# Altium PCB DRAM_TEMP_AD.pcbdoc (part 1 of 2)
Units mil, origin at the board's own origin, x right, y up, seen from the top; angles counter-clockwise.
Board outline 1637.1 x 1239.26 mil, 2 copper layers (Top Layer, Bottom Layer); 88 components, 167 nets, 455 pads, 173 vias.
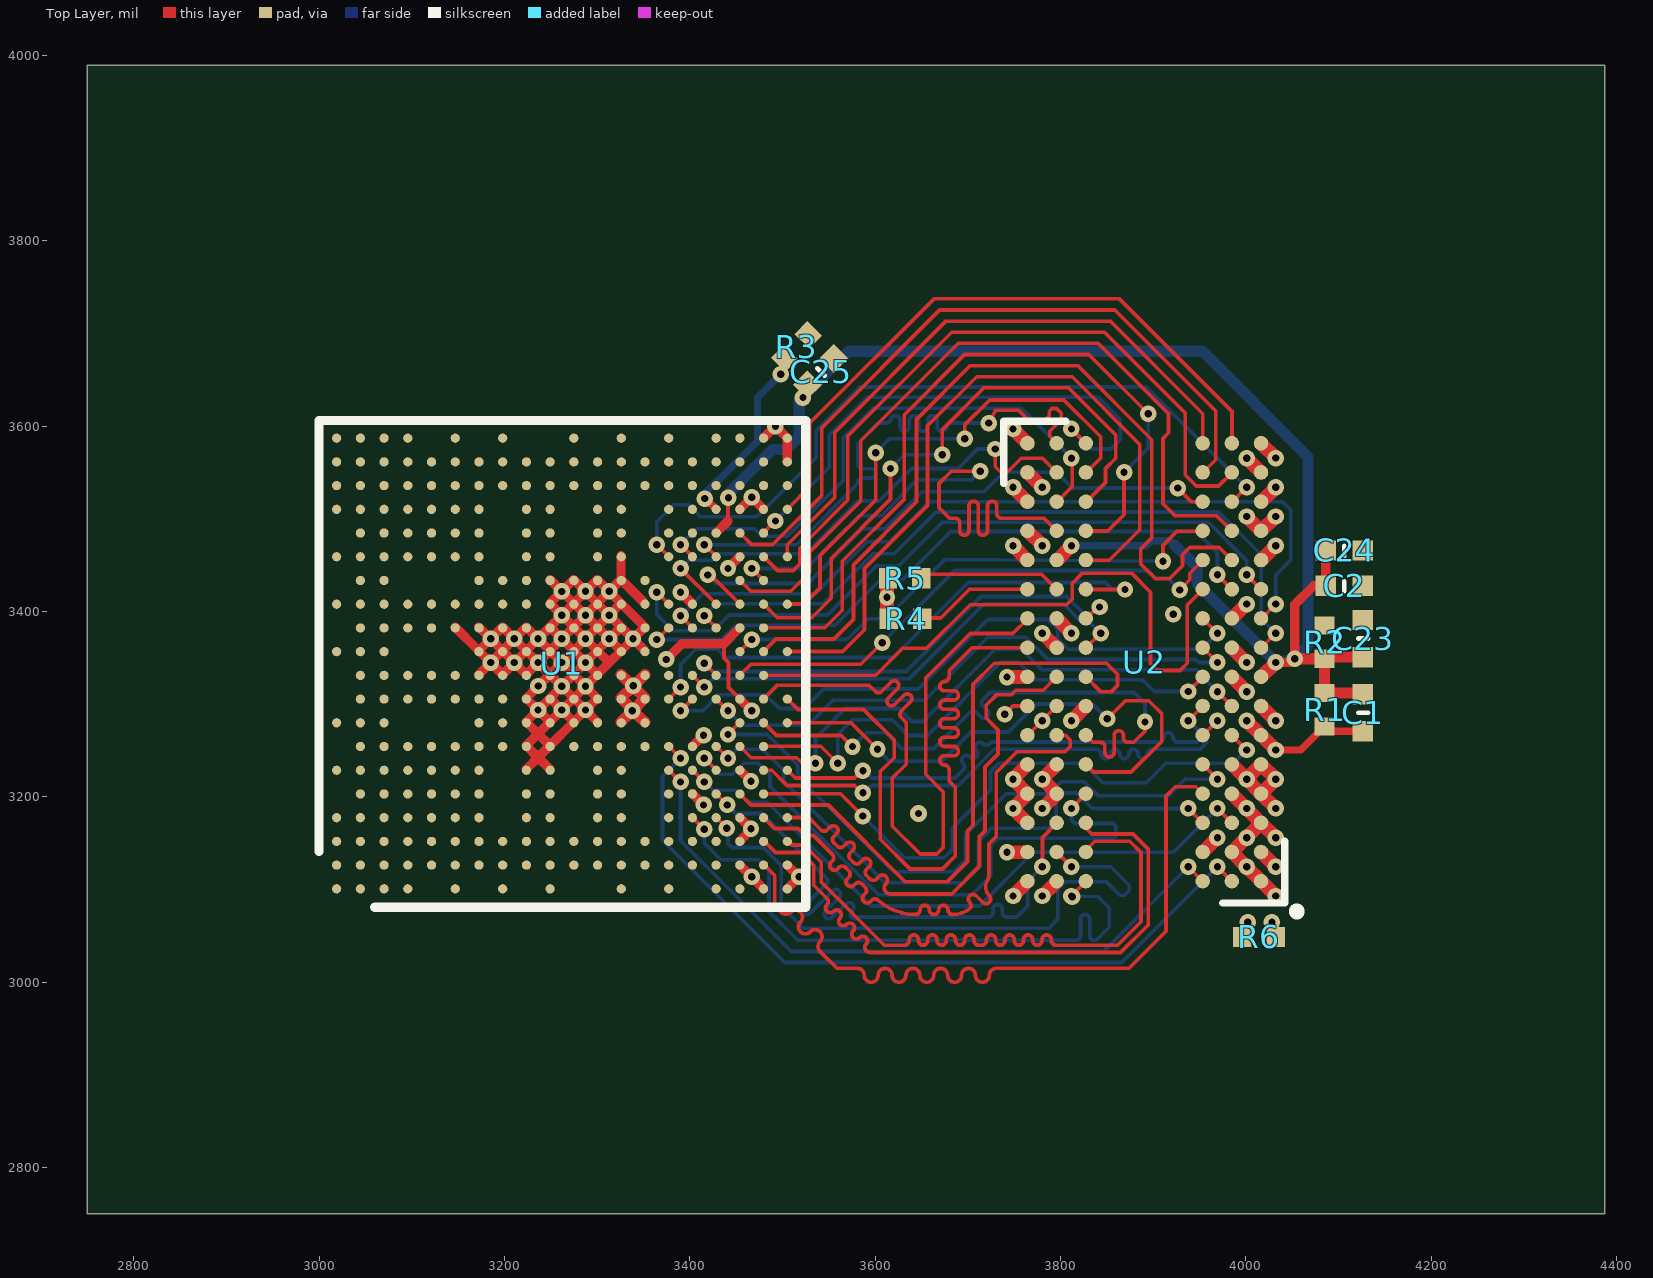
[diagram p0: Top Layer view]
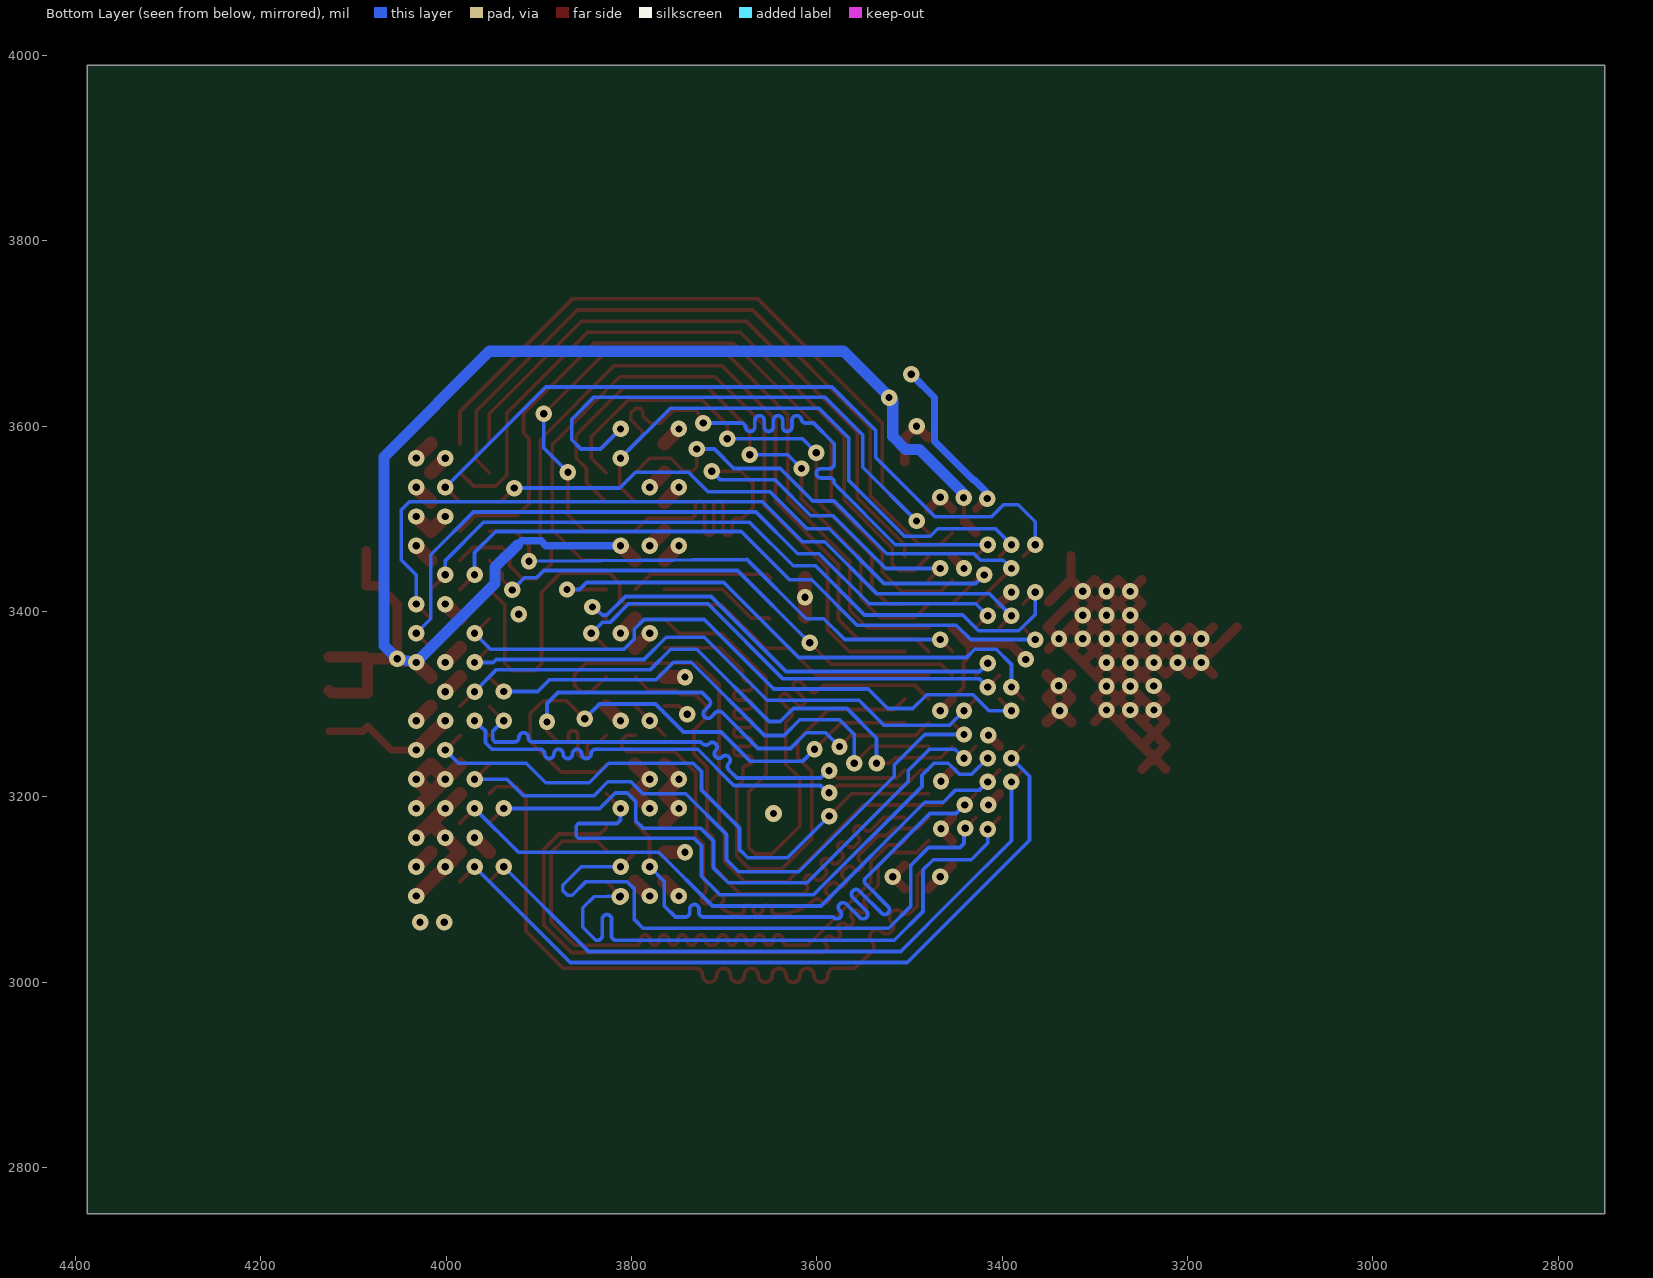
[diagram p1: Bottom Layer view, seen from below]

## Layer stack, top to bottom
Top Solder: solder mask 0.4, Solder Resist, Dk 3.5
Top Layer: signal copper 1.4
Dielectric 1: dielectric 12.6, FR-4, Dk 4.8
Bottom Layer: signal copper 1.4
Bottom Solder: solder mask 0.4, Solder Resist, Dk 3.5

## Board outline
4387.1,2750 2750,2750 2750,3989.26 4387.1,3989.26

## Components (designator, comment, footprint, x,y, rotation, side; value= is the part's Value field where it differs from the comment)
C1 "100nf" d97e8fdd746f4c7ebb948cd77a8558a6 4126.1,3290.8 r270 top
C2 "100nf" 274a75c993d74f52bd3cf981aeacad62 4106.1,3427.8 r180 top
C23 "100nf" 274a75c993d74f52bd3cf981aeacad62 4126.1,3370.8 r270 top
C24 "100nf" 274a75c993d74f52bd3cf981aeacad62 4106.1,3465.8 r180 top
C25 "100nf" 274a75c993d74f52bd3cf981aeacad62 3541.1,3658.8 r225 top
R1 "2K" 473bd841df654c8c86422112e2e4850d 4084.8,3294 r270 top
R2 "2K" 473bd841df654c8c86422112e2e4850d 4084.8,3367 r270 top
R3 "240" 473bd841df654c8c86422112e2e4850d 3515.1,3685.8 r225 top
R4 "240" 473bd841df654c8c86422112e2e4850d 3632.8,3392 r180 top
R5 "240" 473bd841df654c8c86422112e2e4850d 3631.8,3436 r180 top
R6 "100" 473bd841df654c8c86422112e2e4850d 4014.1,3048.8 r0 top
U1 "" "ALLWINNER D1" 3265,3356 r180 top
U2 "" 7343f89065f040aa94b273cc6ee9bc0e 3887.9,3350.4 r180 top
? "" ? 0,0 r0 top
? "" ? 0,0 r0 top
? "" ? 0,0 r0 top
? "" ? 0,0 r0 top
? "" ? 0,0 r0 top
? "" ? 0,0 r0 top
? "" ? 0,0 r0 top
? "" ? 0,0 r0 top
? "" ? 0,0 r0 top
? "" ? 0,0 r0 top
? "" ? 0,0 r0 top
? "" ? 0,0 r0 top
? "" ? 0,0 r0 top
? "" ? 0,0 r0 top
? "" ? 0,0 r0 top
? "" ? 0,0 r0 top
? "" ? 0,0 r0 top
? "" ? 0,0 r0 top
? "" ? 0,0 r0 top
? "" ? 0,0 r0 top
? "" ? 0,0 r0 top
? "" ? 0,0 r0 top
? "" ? 0,0 r0 top
? "" ? 0,0 r0 top
? "" ? 0,0 r0 top
? "" ? 0,0 r0 top
? "" ? 0,0 r0 top
? "" ? 0,0 r0 top
? "" ? 0,0 r0 top
? "" ? 0,0 r0 top
? "" ? 0,0 r0 top
? "" ? 0,0 r0 top
? "" ? 0,0 r0 top
? "" ? 0,0 r0 top
? "" ? 0,0 r0 top
? "" ? 0,0 r0 top
? "" ? 0,0 r0 top
? "" ? 0,0 r0 top
? "" ? 0,0 r0 top
? "" ? 0,0 r0 top
? "" ? 0,0 r0 top
? "" ? 0,0 r0 top
? "" ? 0,0 r0 top
? "" ? 0,0 r0 top
? "" ? 0,0 r0 top
? "" ? 0,0 r0 top
? "" ? 0,0 r0 top
? "" ? 0,0 r0 top
? "" ? 0,0 r0 top
? "" ? 0,0 r0 top
? "" ? 0,0 r0 top
? "" ? 0,0 r0 top
? "" ? 0,0 r0 top
? "" ? 0,0 r0 top
? "" ? 0,0 r0 top
? "" ? 0,0 r0 top
? "" ? 0,0 r0 top
? "" ? 0,0 r0 top
? "" ? 0,0 r0 top
? "" ? 0,0 r0 top
? "" ? 0,0 r0 top
? "" ? 0,0 r0 top
? "" ? 0,0 r0 top
? "" ? 0,0 r0 top
? "" ? 0,0 r0 top
? "" ? 0,0 r0 top
? "" ? 0,0 r0 top
? "" ? 0,0 r0 top
? "" ? 0,0 r0 top
? "" ? 0,0 r0 top
? "" ? 0,0 r0 top
? "" ? 0,0 r0 top
? "" ? 0,0 r0 top
? "" ? 0,0 r0 top
? "" ? 0,0 r0 top

## Footprints (in the part's own frame and the unit in brackets; to place one, negate y for a bottom-side part, rotate by r counter-clockwise, add the part's x,y. Pads: shape width x height; smd on the part's side, far side on the other; paste and mask are expansions set on the pad)
274a75c993d74f52bd3cf981aeacad62 [mil]
  rect 22x22 smd: 1(-19.99,0) 2(20.01,0)
  silkscreen extent 0,-5 0,6
473bd841df654c8c86422112e2e4850d [mil]
  rect 19.68x22 smd: 1(-18,0) 2(18,0)
7343f89065f040aa94b273cc6ee9bc0e [mil]
  round 15.7 smd: A1(-128.4,241.4) A2(-96.9,241.4) A3(-65.4,241.4) A7(60.6,241.4) A8(92.1,241.4) A9(123.6,241.4) B1(-128.4,209.9) B2(-96.9,209.9) B3(-65.4,209.9) B7(60.6,209.9) B8(92.1,209.9) B9(123.6,209.9) C1(-128.4,178.4) C2(-96.9,178.4) C3(-65.4,178.4) C7(60.6,178.4) C8(92.1,178.4) C9(123.6,178.4) D1(-128.4,146.9) D2(-96.9,146.9) D3(-65.4,146.9) D7(60.6,146.9) D8(92.1,146.9) D9(123.6,146.9) E1(-128.4,115.4) E2(-96.9,115.4) E3(-65.4,115.4) E7(60.6,115.4) E8(92.1,115.4) E9(123.6,115.4) F1(-128.4,83.9) F2(-96.9,83.9) F3(-65.4,83.9) F7(60.6,83.9) F8(92.1,83.9) F9(123.6,83.9) G1(-128.4,52.4) G2(-96.9,52.4) G3(-65.4,52.4) G7(60.6,52.4) G8(92.1,52.4) G9(123.6,52.4) H1(-128.4,20.9) H2(-96.9,20.9) H3(-65.4,20.9) H7(60.6,20.9) H8(92.1,20.9) H9(123.6,20.9) J1(-128.4,-10.6) J2(-96.9,-10.6) J3(-65.4,-10.6) J7(60.6,-10.6) J8(92.1,-10.6) J9(123.6,-10.6) K1(-128.4,-42.1) K2(-96.9,-42.1) K3(-65.4,-42.1) K7(60.6,-42.1) K8(92.1,-42.1) K9(123.6,-42.1) L1(-128.4,-73.6) L2(-96.9,-73.6) L3(-65.4,-73.6) L7(60.6,-73.6) L8(92.1,-73.6) L9(123.6,-73.6) M1(-128.4,-105.1) M2(-96.9,-105.1) M3(-65.4,-105.1) M7(60.6,-105.1) M8(92.1,-105.1) M9(123.6,-105.1) N1(-128.4,-136.6) N2(-96.9,-136.6) N3(-65.4,-136.6) N7(60.6,-136.6) N8(92.1,-136.6) N9(123.6,-136.6) P1(-128.4,-168.1) P2(-96.9,-168.1) P3(-65.4,-168.1) P7(60.6,-168.1) P8(92.1,-168.1) P9(123.6,-168.1) R1(-128.4,-199.6) R2(-96.9,-199.6) R3(-65.4,-199.6) R7(60.6,-199.6) R8(92.1,-199.6) R9(123.6,-199.6) T1(-128.4,-231.1) T2(-96.9,-231.1) T3(-65.4,-231.1) T7(60.6,-231.1) T8(92.1,-231.1) T9(123.6,-231.1)
  silkscreen extent -168,-255 149,275
"ALLWINNER D1" [mil]
  round 10 smd: A1(245.98,255.24) A2(245.98,229.65) A3(245.98,204.06) A4(245.98,178.47) A6(245.98,127.29) A8(245.98,76.11) A11(245.98,-0.67) A13(245.98,-51.85) A15(245.98,-103.03) A17(245.98,-154.21) A18(245.98,-179.8) A19(245.98,-205.39) A20(245.98,-230.98) B1(220.39,255.24) B2(220.39,229.65) B3(220.39,204.06) B4(220.39,178.47) B5(220.39,152.88) B6(220.39,127.29) B7(220.39,101.7) B8(220.39,76.11) B9(220.39,50.52) B10(220.39,24.93) B11(220.39,-0.67) B12(220.39,-26.26) B13(220.39,-51.85) B14(220.39,-77.44) B15(220.39,-103.03) B16(220.39,-128.62) B17(220.39,-154.21) B18(220.39,-179.8) B19(220.39,-205.39) B20(220.39,-230.98) C1(194.8,255.24) C2(194.8,229.65) C3(194.8,204.06) C4(194.8,178.47) C5(194.8,152.88) C6(194.8,127.29) C7(194.8,101.7) C8(194.8,76.11) C9(194.8,50.52) C10(194.8,24.93) C11(194.8,-0.67) C12(194.8,-26.26) C13(194.8,-51.85) C14(194.8,-77.44) C15(194.8,-103.03) C16(194.8,-128.62) C17(194.8,-154.21) C18(194.8,-179.8) C19(194.8,-205.39) C20(194.8,-230.98) D1(169.21,255.24) D2(169.21,229.65) D3(169.21,204.06) D4(169.21,178.47) D5(169.21,152.88) D6(169.21,127.29) D7(169.21,101.7) D9(169.21,50.52) D10(169.21,24.93) D12(169.21,-26.26) D13(169.21,-51.85) D15(169.21,-103.03) D16(169.21,-128.62) D17(169.21,-154.21) D18(169.21,-179.8) D19(169.21,-205.39) D20(169.21,-230.98) E2(143.62,229.65) E3(143.62,204.06) E4(143.62,178.47) E5(143.62,152.88) E6(143.62,127.29) E7(143.62,101.7) E9(143.62,50.52) E10(143.62,24.93) E12(143.62,-26.26) E13(143.62,-51.85) E15(143.62,-103.03) E16(143.62,-128.62) E17(143.62,-154.21) E18(143.62,-179.8) E19(143.62,-205.39) F1(118.03,255.24) F2(118.03,229.65) F3(118.03,204.06) F4(118.03,178.47) F5(118.03,152.88) F6(118.03,127.29) F7(118.03,101.7) F9(118.03,50.52) F10(118.03,24.93) F12(118.03,-26.26) F13(118.03,-51.85) F15(118.03,-103.03) F16(118.03,-128.62) F17(118.03,-154.21) F18(118.03,-179.8) F19(118.03,-205.39) F20(118.03,-230.98) G2(92.44,229.65) G3(92.44,204.06) G4(92.44,178.47) G5(92.44,152.88) G6(92.44,127.29) G7(92.44,101.7) G8(92.44,76.11) G9(92.44,50.52) G10(92.44,24.93) G11(92.44,-0.67) G12(92.44,-26.26) G13(92.44,-51.85) G14(92.44,-77.44) G15(92.44,-103.03) G16(92.44,-128.62) G17(92.44,-154.21) G18(92.44,-179.8) G19(92.44,-205.39) H1(66.85,255.24) H2(66.85,229.65) H3(66.85,204.06) H7(66.85,101.7) H8(66.85,76.11) H9(66.85,50.52) H10(66.85,24.93) H11(66.85,-0.67) H12(66.85,-26.26) H13(66.85,-51.85) H14(66.85,-77.44) H18(66.85,-179.8) H19(66.85,-205.39) H20(66.85,-230.98) J2(41.26,229.65) J3(41.26,204.06) J4(41.26,178.47) J5(41.26,152.88) J6(41.26,127.29) J7(41.26,101.7) J8(41.26,76.11) J9(41.26,50.52) J10(41.26,24.93) J11(41.26,-0.67) J12(41.26,-26.26) J13(41.26,-51.85) J14(41.26,-77.44) J15(41.26,-103.03) J16(41.26,-128.62) J17(41.26,-154.21) J18(41.26,-179.8) J19(41.26,-205.39) K1(15.67,255.24) K2(15.67,229.65) K3(15.67,204.06) K4(15.67,178.47) K5(15.67,152.88) K6(15.67,127.29) K7(15.67,101.7) K8(15.67,76.11) K9(15.67,50.52) K10(15.67,24.93) K11(15.67,-0.67) K12(15.67,-26.26) K13(15.67,-51.85) K14(15.67,-77.44) K15(15.67,-103.03) K16(15.67,-128.62) K17(15.67,-154.21) K18(15.67,-179.8) K19(15.67,-205.39) L2(-9.93,229.65) L3(-9.93,204.06) L7(-9.93,101.7) L8(-9.93,76.11) L9(-9.93,50.52) L10(-9.93,24.93) L11(-9.93,-0.67) L12(-9.93,-26.26) L13(-9.93,-51.85) L14(-9.93,-77.44) L18(-9.93,-179.8) L19(-9.93,-205.39) L20(-9.93,-230.98) M2(-35.52,229.65) M3(-35.52,204.06) M4(-35.52,178.47) M5(-35.52,152.88) M6(-35.52,127.29) M7(-35.52,101.7) M8(-35.52,76.11) M9(-35.52,50.52) M10(-35.52,24.93) M11(-35.52,-0.67) M12(-35.52,-26.26) M13(-35.52,-51.85) M14(-35.52,-77.44) M15(-35.52,-103.03) M16(-35.52,-128.62) M17(-35.52,-154.21) M18(-35.52,-179.8) M19(-35.52,-205.39) N1(-61.11,255.24) N2(-61.11,229.65) N3(-61.11,204.06) N4(-61.11,178.47) N5(-61.11,152.88) N6(-61.11,127.29) N7(-61.11,101.7) N8(-61.11,76.11) N9(-61.11,50.52) N10(-61.11,24.93) N11(-61.11,-0.67) N12(-61.11,-26.26) N13(-61.11,-51.85) N14(-61.11,-77.44) N15(-61.11,-103.03) N16(-61.11,-128.62) N17(-61.11,-154.21) N18(-61.11,-179.8) N19(-61.11,-205.39) N20(-61.11,-230.98) P2(-86.7,229.65) P3(-86.7,204.06) P7(-86.7,101.7) P8(-86.7,76.11) P9(-86.7,50.52) P10(-86.7,24.93) P11(-86.7,-0.67) P12(-86.7,-26.26) P13(-86.7,-51.85) P14(-86.7,-77.44) P18(-86.7,-179.8) P19(-86.7,-205.39) R1(-112.29,255.24) R2(-112.29,229.65) R3(-112.29,204.06) R4(-112.29,178.47) R5(-112.29,152.88) R6(-112.29,127.29) R7(-112.29,101.7) R9(-112.29,50.52) R10(-112.29,24.93) R12(-112.29,-26.26) R13(-112.29,-51.85) R15(-112.29,-103.03) R16(-112.29,-128.62) R17(-112.29,-154.21) R18(-112.29,-179.8) R19(-112.29,-205.39) R20(-112.29,-230.98) T2(-137.88,229.65) T3(-137.88,204.06) T4(-137.88,178.47) T5(-137.88,152.88) T6(-137.88,127.29) T7(-137.88,101.7) T9(-137.88,50.52) T10(-137.88,24.93) T12(-137.88,-26.26) T13(-137.88,-51.85) T15(-137.88,-103.03) T16(-137.88,-128.62) T17(-137.88,-154.21) T18(-137.88,-179.8) T19(-137.88,-205.39) U1(-163.47,255.24) U2(-163.47,229.65) U3(-163.47,204.06) U4(-163.47,178.47) U5(-163.47,152.88) U6(-163.47,127.29) U7(-163.47,101.7) U9(-163.47,50.52) U10(-163.47,24.93) U12(-163.47,-26.26) U13(-163.47,-51.85) U15(-163.47,-103.03) U16(-163.47,-128.62) U17(-163.47,-154.21) U18(-163.47,-179.8) U19(-163.47,-205.39) U20(-163.47,-230.98) V1(-189.06,255.24) V2(-189.06,229.65) V3(-189.06,204.06) V4(-189.06,178.47) V5(-189.06,152.88) V6(-189.06,127.29) V7(-189.06,101.7) V8(-189.06,76.11) V9(-189.06,50.52) V10(-189.06,24.93) V11(-189.06,-0.67) V12(-189.06,-26.26) V13(-189.06,-51.85) V14(-189.06,-77.44) V15(-189.06,-103.03) V16(-189.06,-128.62) V17(-189.06,-154.21) V18(-189.06,-179.8) V19(-189.06,-205.39) V20(-189.06,-230.98) W1(-214.65,255.24) W2(-214.65,229.65) W3(-214.65,204.06) W4(-214.65,178.47) W5(-214.65,152.88) W6(-214.65,127.29) W7(-214.65,101.7) W8(-214.65,76.11) W9(-214.65,50.52) W10(-214.65,24.93) W11(-214.65,-0.67) W12(-214.65,-26.26) W13(-214.65,-51.85) W14(-214.65,-77.44) W15(-214.65,-103.03) W16(-214.65,-128.62) W17(-214.65,-154.21) W18(-214.65,-179.8) W19(-214.65,-205.39) W20(-214.65,-230.98) Y1(-240.24,255.24) Y2(-240.24,229.65) Y3(-240.24,204.06) Y4(-240.24,178.47) Y6(-240.24,127.29) Y8(-240.24,76.11) Y9(-240.24,50.52) Y11(-240.24,-0.67) Y13(-240.24,-51.85) Y15(-240.24,-103.03) Y17(-240.24,-154.21) Y18(-240.24,-179.8) Y19(-240.24,-205.39) Y20(-240.24,-230.98)
  silkscreen extent -260,-250 265,275
d97e8fdd746f4c7ebb948cd77a8558a6 [mil]
  rect 22x22 smd: 1(-20,0) 2(20,0)
  silkscreen extent 0,-5 0,6
? [mil]

## Via types
v1: diameter 17.72, hole 7.87, Top Layer to Bottom Layer, 140 vias
v2: diameter 17.7, hole 7.9, Top Layer to Bottom Layer, 29 vias
v3: diameter 18, hole 8, Top Layer to Bottom Layer, 4 vias

## Nets (pads, with @x,y where several pads share a name; then routed paths per layer and width w, separated by ;. In a path a pad name is that pad's centre, name@x,y a point inside that pad or via, vN(x,y) a via of type N, cw(c..) or ccw(c..) an arc to the next point about the centre after c; other vN are vias at no path point)
0V9: 
1V5: C1.2 U1.N8 U1.N9 U1.N10 U1.P8 U1.P9 U1.P10 U2.A8 U2.B2 U2.C1 U2.C9 U2.D2 U2.D9 U2.E9 U2.F1 U2.G7 U2.H2 U2.H9 U2.K2 U2.K8 U2.N1 U2.N9 U2.R1 U2.R9 | length 808.6
  Top Layer w8: v1(4032.26,3250.51) 4059.31,3250.51 4084.8,3276 4090,3270.8 C1.2@4126.1,3270.8
  Top Layer w12: U1.N8@3325.91,3280.89 v3(3338.1,3292.8) ; U1.N10@3325.91,3332.07 v3@3338.7,3319.28 ; v3@3338.7,3293.68 3325.91,3306.48 v3@3338.7,3319.28 ; v3(3339.1,3319.8) v3@3338.7,3319.28 ; U1.P8@3351.5,3280.89 v3(3338.1,3292.8) ; U1.P10@3351.5,3332.07 v3@3338.7,3319.28 ; v3(3338.1,3292.8) 3351.5,3306.48 v3@3338.7,3319.28
  Top Layer w15: v1(3742.28,3329.25) U2.H9@3764.55,3329.25 ; U2.C9@3764.55,3171.77 v1(3748.8,3187.52) 3764.55,3203.27 v1(3748.8,3219.01) U2.E9@3764.55,3234.76 ; U2.N9@3764.55,3486.73 v1(3780.3,3470.98) ; U2.R9@3764.55,3549.72 v1(3780.3,3533.97) ; v1(3780.29,3093.03) U2.A8@3796.04,3108.78 ; U2.K8@3796.04,3392.24 v1(3811.79,3376.49) ; v1(3811.79,3282.01) U2.G7@3827.54,3297.76 ; U2.D2@3985.02,3203.27 v1(4000.77,3187.52) ; U2.H2@3985.02,3329.25 v1(4000.77,3313.5) ; U2.K2@3985.02,3392.24 v1(4000.77,3407.98) ; v1@4000.73,3124.49 4016.28,3108.98 v1(4032.26,3093.03) ; v1(4000.77,3124.53) 3985.02,3140.28 v1(4000.76,3156.02) U2.C1@4016.51,3171.76 ; v1(4000.76,3282) U2.F1@4016.3,3266.5 v1(4032.26,3250.51) ; v1(4000.76,3502.47) 4016.51,3486.73 v1(4032.26,3502.47) ; v1(4000.76,3565.46) U2.R1@4016.51,3549.72 ; v1(4000.77,3187.52) U2.C1@4016.51,3171.77 ; v1(4032.26,3156.02) U2.C1@4016.51,3171.76
1V8: U1.P14
3V3: U1.E4
$1N3408: 
$1N3418: 
$1N3424: 
$1N3432: 
$1N3433: 
$1N3434: 
$2N3534: U1.U17 | length 185.7
  Top Layer w8: v2(3416.1,3521.8) 3416.88,3521.8 U1.U17@3428.47,3510.21
  Bottom Layer w8: v2(3416.1,3521.8) 3416.1,3527.8 3430.1,3541.8 3431.1,3541.8 3473.1,3583.8 3473.1,3630.8 v2(3498.1,3655.8)
$2N3599: R4.1 U2.L9 | length 126.8
  Top Layer w4: R4.1@3650.8,3392 3651.8,3393 3670.8,3393 3701.8,3424 U2.L9@3764.3,3424
$2N3600: R5.1 U2.L8 | length 154.3
  Top Layer w4: R5.1@3649.8,3436 3653.8,3440 3779.8,3440 U2.L8@3795.8,3424
$3N2270: 
$3N2271: 
$3N2545: U1.D9
$3N2556: U1.C9
$3N2562: U1.E10
$3N2568: U1.F10
$3N2574: U1.B9
$3N2580: U1.E18
$3N2586: U1.E19
$3N2592: U1.E9
$3N2601: U1.M17
$3N2609: U1.K18
$3N2621: U1.K19
$3N2635: U1.J18
$3N2636: U1.J19
$3N2637: U1.H19
$3N2654: U1.H20
$3N2655: U1.L19
$3N2656: U1.L20
$3N2657: U1.G19
$3N2658: U1.G18
$3N2659: U1.F19
$3N2671: U1.F20
$6N745: U1.D7
$6N750: U1.E7
$6N753: U1.F7
$6N756: U1.F6
$6N757: U1.E6
$6N767: U1.D6
$6N768: U1.D5
$6N769: U1.D4
$6N770: U1.C6
$6N771: U1.B6
$6N778: U1.A6
$6N779: U1.C5
$6N780: U1.B5
$6N781: U1.B4
$6N782: U1.A4
$6N789: U1.C3
$6N790: U1.A3
$6N791: U1.B3
$6N792: U1.B2
$6N4195: 
$6N4196: 
$6N4201: 
$6N4202: 
$6N4203: 
$6N4204: 
$6N4213: 
$7N781: 
$7N1968: U1.D2
AP_WAKE_BT: 
BT_RSTN: 
BT_WAKE_AP: 
D0+: U1.B7
D0-: U1.C7
D1+: U1.A8
D1-: U1.B8
EMMC_CLK: 
EMMC_CMD: U1.D1
EMMC_D0: U1.C1
EMMC_D1: U1.C2
EMMC_D2: U1.E2
EMMC_D3: U1.E3
GND: R2.1 R3.1 U1.A2 U1.A15 U1.A19 U1.A20 U1.B1 U1.B10 U1.B20 U1.C4 U1.C8 U1.C10 U1.E5 U1.F3 U1.F9 U1.F12 U1.F18 U1.G10 U1.G11 U1.G12 U1.H1 U1.H2 U1.H10 U1.H11 U1.H12 U1.H18 U1.J3 U1.J6 U1.J7 U1.J8 U1.J9 U1.J10 U1.J11 U1.J12 U1.K3 U1.K6 U1.K7 U1.K8 U1.K9 U1.K10 U1.K11 U1.K12 U1.K13 U1.K14 U1.L8 U1.L9 U1.L10 U1.L11 U1.L12 U1.L13 U1.L14 U1.L18 U1.M3 U1.M5 U1.M8 U1.M9 U1.M10 U1.M11 U1.M12 U1.M13 U1.M14 U1.N11 U1.N12 U1.N13 U1.N14 U1.N15 U1.N18 U1.P7 U1.P11 U1.P12 U1.P13 U1.R10 U1.R18 U1.T5 U1.T7 U1.T13 U1.V2 U1.V3 U1.V4 U1.V6 U1.V9 U1.V12 U1.V15 U1.V17 U1.W1 U1.W17 U1.W20 U1.Y1 U1.Y2 U1.Y19 U1.Y20 U2.A9 U2.B1 U2.B3 U2.B9 U2.D1 U2.D8 U2.E1 U2.E2 U2.E8 U2.F9 U2.G1 U2.G8 U2.G9 U2.J2 U2.J8 U2.M1 U2.M9 U2.P1 U2.P9 U2.T1 U2.T9 | length 3218.4
  Top Layer w4: v1(3739.8,3289) 3748.8,3298 U2.G9@3764.3,3298 ; U2.F9@3764.3,3266.5 v1(3780.29,3282.01) U2.G8@3795.8,3298
  Top Layer w4.5: 3436.85,3365.26 3436.85,3349.96 3441.89,3344.92 3441.89,3317.82 U1.V9@3454.04,3305.67
  Top Layer w10: U1.F12@3146.77,3383.26 U1.G11@3172.36,3357.67 ; U1.G10@3172.36,3332.07 v2(3185.16,3344.87) ; U1.G12@3172.36,3383.26 v2(3185.16,3370.47) ; U1.J6@3223.55,3229.7 3236.34,3242.5 ; U1.J10@3223.54,3332.07 v2(3236.34,3344.87) ; U1.J10@3223.54,3332.08 v2(3210.74,3344.88) ; U1.K6@3249.13,3229.71 3236.34,3242.5 ; U1.K14@3249.13,3434.44 v2(3261.93,3421.64) ; U1.L8@3274.72,3280.89 v2(3261.93,3293.68) ; U1.L13@3274.73,3408.85 v2(3287.53,3421.64) ; U1.M8@3300.32,3280.89 v2(3287.53,3293.68) ; v2(3313.11,3370.47) U1.N11@3325.91,3357.66 ; U1.N15@3325.91,3460.03 U1.N14@3325.91,3434.44 ; U1.P11@3350.06,3359.11 v2(3338.71,3370.46) ; U1.P13@3350.06,3410.29 U1.N14@3325.91,3434.44 ; v1(3374.54,3348.26) 3391.54,3365.26 3436.85,3365.26 U1.V12@3454.04,3382.45 ; v1(3390.07,3420.83) U1.T13@3402.86,3408.04 ; U1.T5@3402.86,3203.31 v1(3414.86,3191.31) ; U1.T7@3402.86,3254.49 v1(3414.86,3266.49) ; v1(3441.25,3446.42) U1.V15@3454.04,3459.22 ; U1.V2@3454.04,3126.54 v1(3466.84,3113.74) U1.W1@3479.63,3100.95 ; U1.V3@3454.04,3152.13 v1(3466.04,3165.72) U1.V4@3454.04,3177.72 ; U1.V6@3454.04,3228.9 v1(3466.04,3216.9) ; U1.V9@3454.04,3305.67 v1(3466.84,3292.87) ; U1.V17@3454.04,3510.4 v1(3466.84,3523.19) U1.W17@3479.63,3510.4 ; U1.W20@3479.63,3587.17 v1(3492.43,3599.96) 3505.22,3587.17 U1.Y19@3505.22,3561.58 ; U1.Y1@3505.22,3100.95 v1(3518.02,3113.74) U1.Y2@3505.22,3126.54 ; U1.G11@3172.36,3357.67 v2(3185.16,3370.47) ; U1.G11@3172.36,3357.67 v2(3185.16,3344.87) ; v2(3185.16,3344.87) 3197.95,3332.08 v2(3210.74,3344.88) ; v2(3185.16,3344.87) U1.H11@3197.95,3357.66 ; v2(3185.16,3370.47) 3197.95,3383.26 v2(3210.75,3370.46) ; v2(3185.16,3370.47) U1.H11@3197.95,3357.66 ; U1.H11@3197.95,3357.66 v2(3210.75,3370.46) ; U1.H11@3197.95,3357.66 v2(3210.74,3344.88) ; v2(3210.74,3344.88) U1.J11@3223.54,3357.67 ; v2(3210.75,3370.46) 3223.54,3383.25 v2(3236.34,3370.47) ; v2(3210.75,3370.46) U1.J11@3223.54,3357.67 ; U1.J11@3223.54,3357.67 v2(3236.34,3344.87) ; U1.J11@3223.54,3357.67 v2(3236.34,3370.47) ; 3236.34,3242.5 U1.K7@3249.14,3255.3 ; 3236.34,3242.5 3223.54,3255.3 3236.34,3268.09 ; 3236.34,3268.09 U1.K8@3249.14,3280.89 ; 3236.34,3268.09 3223.54,3280.89 v2(3236.34,3293.68) ; 3236.34,3268.09 U1.K7@3249.13,3255.3 ; v2(3236.34,3293.68) 3223.54,3306.48 v2(3236.66,3319.6) U1.K10@3249.14,3332.07 ; v2(3236.34,3293.68) U1.K8@3249.14,3280.89 ; v2(3236.34,3293.68) U1.K9@3249.13,3306.48 ; v2(3236.34,3344.87) U1.K10@3249.14,3332.07 ; v2(3236.34,3344.87) U1.K11@3249.13,3357.66 ; v2(3236.34,3370.47) U1.K12@3249.14,3383.26 ; v2(3236.34,3370.47) U1.K11@3249.13,3357.67 ; U1.K7@3249.14,3255.3 3274.73,3280.89 v2(3287.53,3293.68) ; U1.K8@3249.14,3280.89 v2(3261.93,3293.68) ; U1.K9@3249.13,3306.48 v2(3261.93,3319.28) ; U1.K9@3249.13,3306.48 v2(3261.93,3293.68) ; U1.K10@3249.14,3332.07 v2(3261.93,3319.28) ; U1.K10@3249.14,3332.07 v2(3261.93,3344.87) ; U1.K11@3249.14,3357.67 v2(3261.93,3370.46) ; U1.K11@3249.14,3357.66 v2(3261.93,3344.87) ; U1.K12@3249.14,3383.26 v2(3261.93,3370.46) ; U1.K12@3249.14,3383.26 v2(3261.93,3396.05) ; v2(3261.93,3293.68) U1.L9@3274.73,3306.48 ; v2(3261.93,3319.28) U1.L9@3274.73,3306.48 ; v2(3261.93,3319.28) U1.L10@3274.72,3332.07 ; v2(3261.93,3344.87) U1.L10@3274.72,3332.07 ; v2(3261.93,3344.87) 3274.72,3357.66 v2(3261.93,3370.46) ; v2(3261.93,3370.46) U1.L12@3274.72,3383.26 ; v2(3261.93,3396.05) 3249.13,3408.85 v2(3261.93,3421.64) ; v2(3261.93,3396.05) U1.L12@3274.72,3383.26 ; v2(3261.93,3396.05) U1.L13@3274.72,3408.84 ; v2(3261.93,3421.64) 3274.73,3434.44 v2(3287.53,3421.64) ; v2(3261.93,3421.64) U1.L13@3274.72,3408.85 ; U1.L10@3274.72,3332.07 v2(3287.53,3319.28) ; U1.L10@3274.72,3332.07 v2(3287.52,3344.87) ; U1.L12@3274.72,3383.26 v2(3287.52,3370.46) ; U1.L12@3274.72,3383.26 v2@3287.5,3396.03 ; U1.L13@3274.72,3408.84 v2@3287.52,3396.05 ; U1.L9@3274.73,3306.48 v2(3287.53,3319.28) ; U1.L9@3274.73,3306.48 v2(3287.53,3293.68) ; v2(3287.53,3293.68) 3300.32,3306.48 v2(3287.53,3319.28) ; v2(3287.53,3319.28) U1.M10@3300.32,3332.07 ; v2(3287.52,3344.87) U1.M10@3300.32,3332.07 ; v2(3287.52,3344.87) U1.M11@3300.32,3357.66 ; v2(3287.52,3344.87) 3274.73,3357.66 v2(3287.52,3370.46) ; v2(3287.52,3370.46) U1.M12@3300.32,3383.26 ; v2(3287.52,3370.46) U1.M11@3300.31,3357.67 ; v2@3287.52,3396.05 U1.M13@3300.32,3408.85 ; v2@3287.5,3396.03 U1.M12@3300.32,3383.26 ; v2(3287.53,3421.64) U1.M13@3300.32,3408.85 ; v2(3287.53,3421.64) 3300.32,3434.44 v2(3313.11,3421.64) ; U1.M10@3300.32,3332.07 3313.73,3345.48 ; U1.M11@3300.32,3357.66 3312.5,3345.48 3313.73,3345.48 ; U1.M11@3300.32,3357.66 v2(3313.11,3370.47) ; U1.M12@3300.32,3383.26 v2(3313.11,3396.05) ; U1.M12@3300.32,3383.26 v2(3313.11,3370.47) ; U1.M13@3300.32,3408.85 v2(3313.11,3396.05) ; U1.M13@3300.32,3408.85 v2(3313.11,3421.64) ; v2(3313.11,3370.47) U1.N12@3325.91,3383.26 ; v2(3313.11,3396.05) U1.N12@3325.91,3383.26 ; v2(3313.11,3396.05) U1.N13@3325.91,3408.85 ; v2(3313.11,3421.64) U1.N13@3325.91,3408.85 ; v2(3313.11,3421.64) U1.N14@3325.91,3434.44 ; 3313.73,3345.48 U1.N11@3325.91,3357.66 ; U1.N11@3325.91,3357.66 v2(3338.71,3370.46) ; U1.N12@3325.91,3383.26 v2(3338.71,3370.46) ; U1.N13@3325.91,3408.85 3351.5,3383.26 v2(3338.71,3370.46)
  Top Layer w15: 3612.81,3394.26 v1(3612.81,3415.26) 3612.81,3436.26 ; v1(3742.28,3140.28) U2.B9@3764.55,3140.28 ; v1(3748.8,3093.03) U2.A9@3764.55,3108.78 ; v1(3748.8,3470.98) U2.M9@3764.55,3455.24 ; v1(3748.8,3533.97) U2.P9@3764.55,3518.23 ; v1(3748.8,3596.97) U2.T9@3764.55,3581.22 ; v1(3780.29,3187.52) 3796.04,3203.27 v1(3780.29,3219.01) U2.E8@3796.04,3234.76 ; v1(3780.29,3376.49) U2.J8@3796.04,3360.75 ; U2.B3@3953.52,3140.28 v1(3969.27,3156.02) ; U2.E2@3985.02,3234.76 v1(4000.77,3219.01) ; U2.J2@3985.02,3360.75 v1(4000.77,3345) ; U2.B1@4016.51,3140.28 v1(4032.26,3124.53) ; U2.G1@4016.51,3297.76 v1(4032.26,3282.01) ; U2.M1@4016.51,3455.24 v1(4032.26,3470.98) ; U2.P1@4016.51,3518.23 v1(4032.26,3533.97) ; U2.T1@4016.51,3581.22 v1(4032.26,3565.47) ; v1(4032.26,3187.52) U2.D1@4016.51,3203.27 ; v1(4000.77,3219.01) 4016.51,3234.76 v1(4032.26,3219.01) U2.D1@4016.51,3203.27 ; v1(4000.77,3219.01) U2.D1@4016.51,3203.27
  Mid-Layer 2 w8: v1(4000.77,3345) 4032.26,3313.51 v1(4032.26,3282.01)
  other v1: 3921.68,3397.13
  other v2: 3287.53,3396.05
  other v3: 3646.8,3182
GPADC0: U1.C13
GPADC1: U1.B13
HX1: 
HX2: 
HXIN: U1.K1
HXOUT: U1.K2
I2S1_BCLK: 
I2S1_DIN: 
I2S1_DOUT: 
I2S1_LRCK: 
LPCLK: 
LRADC: U1.B12
LXIN: U1.L2
LXOUT: U1.L3
PF6: U1.D3
PG11: 
SA0: U1.V11 U2.N3 | length 563.7
  Top Layer w4: U1.V11@3454.04,3356.86 v1(3466.84,3369.65) ; v1(3910.54,3454.26) 3910.54,3471.26 3925.76,3486.47 U2.N3@3953.27,3486.47
  Bottom Layer w4: v1(3466.84,3369.65) 3569.94,3369.65 3592.54,3392.26 3611.54,3392.26 3675.4,3456.12 v1(3910.54,3454.26)
SA1: U1.W13 U2.P7 | length 656.1
  Top Layer w4: U1.W13@3479.63,3408.04 3494.41,3393.26 3531.54,3393.26 3552.54,3414.26 3552.54,3457.26 3616.54,3521.26 v1(3616.54,3554.26) ; v1(3672.54,3569.12) 3672.54,3596.26 3717.54,3641.26 3808.54,3641.26 3859.54,3590.26 3859.54,3565.26 3848.54,3554.26 3848.54,3539.23 3827.54,3518.23 U2.P7@3828.03,3518.23
  Bottom Layer w4: v1(3616.54,3554.26) 3631.4,3569.12 v1(3672.54,3569.12)
SA2: U1.V13 U2.P3 | length 648.2
  Top Layer w4: v1(3419.54,3439.4) 3422.68,3439.4 U1.V13@3454.04,3408.04 ; v1(3926.54,3533.12) 3941.43,3518.23 U2.P3@3953.52,3518.23
  Bottom Layer w4: v1(3419.54,3439.4) 3428.68,3430.26 3527.54,3430.26 3586.54,3489.26 3610.54,3489.26 3650.54,3529.26 3717.54,3529.26 3738.54,3550.26 3795.54,3550.26 3812.68,3533.12 v1(3926.54,3533.12)
SA3: U1.V14 U2.N2 | length 846.9
  Top Layer w4: U1.V14@3454.04,3433.63 3465.95,3421.72 3509.01,3421.72 3529.54,3442.26 3529.54,3464.26 3584.54,3519.26 3584.54,3584.26 3689.54,3689.26 3840.54,3689.26 3916.54,3613.26 3916.54,3592.74 3910.54,3586.74 3910.54,3516.26 3923.43,3503.37 3968.38,3503.37 U2.N2@3985.02,3486.73
SA4: U1.T15 U2.P8 | length 611.5
  Top Layer w4: v1(3390.07,3472.01) U1.T15@3402.86,3459.22 ; U2.P8@3796.04,3518.23 3812.54,3534.73 v1@3812.54,3566.26
  Bottom Layer w4: v1(3390.07,3472.01) 3407.31,3489.26 3469.55,3489.26 3477.55,3481.26 3505.54,3481.26 3565.54,3541.26 3565.54,3587.26 3597.54,3619.26 3758,3619.26 v1(3811.79,3565.46)
SA5: U1.R15 U2.P2 | length 834.4
  Top Layer w4: v1(3364.48,3472.01) U1.R15@3377.27,3459.22 ; U2.P2@3985.02,3518.23 v1(4000.77,3533.97)
  Bottom Layer w4: v1(3364.48,3472.01) 3364.48,3496.92 3382.68,3515.13 3398.68,3515.13 3411.68,3502.13 3472.41,3502.13 3536.54,3566.26 3536.54,3595.26 3583.54,3642.26 3892.49,3642.26 v1(4000.77,3533.97)
SA6: U1.U13 U2.R8 | length 546.9
  Top Layer w4: v1(3390.07,3446.42) U1.U13@3428.45,3408.04 ; v1(3729.54,3575.26) 3729.54,3556.26 3734.54,3551.26 3743.54,3551.26 3757.54,3565.26 3780.5,3565.26 U2.R8@3796.04,3549.72
  Bottom Layer w4: v1(3390.07,3446.42) 3398.9,3455.26 3423.31,3455.26 3430.31,3462.26 3524.54,3462.26 3581.54,3519.26 3604.54,3519.26 3639.54,3554.26 3689.54,3554.26 3710.54,3575.26 v1(3729.54,3575.26)
SA7: U1.W15 U2.R2 | length 782.4
  Top Layer w4: U1.W15@3479.63,3459.22 3494.59,3444.26 3511.54,3444.26 3518.54,3451.26 3518.54,3468.26 3570.54,3520.26 3570.54,3589.26 3682.54,3701.26 3847.54,3701.26 3934.54,3614.26 3934.54,3547.26 3946.54,3535.26 3970.56,3535.26 U2.R2@3985.02,3549.72
SA8: U1.U15 U2.T8 | length 662.9
  Top Layer w4: v1(3415.66,3472.01) U1.U15@3428.45,3459.22 ; v1@3722.54,3609.74 v1(3722.54,3603.26) 3729.8,3617 3754.8,3617 3768.8,3603 3779.8,3603 3787.8,3611 3787.8,3616 3790.8,3619 3795.8,3619 3800.8,3614 3800.8,3607 3788.27,3594.47 3788.27,3588.99 U2.T8@3795.27,3581.99
  Bottom Layer w4: v1(3415.66,3472.01) 3515.3,3472.01 3581.3,3538.02 3581.3,3539.08 cw(c3586.3,3539.08) 3586.3,3544.08 3595.54,3544.08 ccw(c3595.54,3549.08) 3600.54,3549.08 ccw(c3595.54,3549.08) 3595.54,3554.08 3586.3,3554.08 cw(c3586.3,3559.08) 3581.3,3559.08 3581.3,3581.02 3603.54,3603.26 3611.9,3603.26 ccw(c3611.9,3608.26) 3616.9,3608.26 3616.9,3606.26 cw(c3621.9,3606.26) 3621.9,3611.26 cw(c3621.9,3606.26) 3626.9,3606.26 3626.9,3599.26 ccw(c3631.9,3599.26) 3631.9,3594.26 ccw(c3631.9,3599.26) 3636.9,3599.26 3636.9,3606.26 cw(c3641.9,3606.26) 3641.9,3611.26 cw(c3641.9,3606.26) 3646.9,3606.26 3646.9,3599.26 ccw(c3651.9,3599.26) 3651.9,3594.26 ccw(c3651.9,3599.26) 3656.9,3599.26 3656.9,3606.26 cw(c3661.9,3606.26) 3661.9,3611.26 cw(c3661.9,3606.26) 3666.9,3606.26 3666.9,3599.26 ccw(c3671.9,3599.26) 3671.9,3594.26 ccw(c3671.9,3599.26) 3676.9,3599.26 3676.9,3598.26 cw(c3681.9,3598.26) 3681.9,3603.26 v1(3722.54,3603.26)
  other v1: 3722.54,3603.26 3722.54,3603.26
SA9: U1.V16 U2.R3 | length 783.6
  Top Layer w4: U1.V16@3454.04,3484.81 3466.59,3472.26 3489.54,3472.26 3542.54,3525.26 3542.54,3598.26 3669.54,3725.26 3858.54,3725.26 3967.4,3616.4 3967.4,3563.59 U2.R3@3953.52,3549.72
SA10: U1.R9 U2.L7 | length 611.1
  Top Layer w4: U1.R9@3377.27,3305.67 v1(3390.07,3318.46) ; U2.L7@3827.54,3423.74 v1(3869.54,3423.74)
  Bottom Layer w4: v1(3390.07,3318.46) 3390.07,3342.78 3406.54,3359.26 3429.54,3359.26 3438.54,3350.26 3619.54,3350.26 3700.54,3431.26 3848.54,3431.26 3856.06,3423.74 v1(3869.54,3423.74)
SA11: U1.Y13 U2.R7 | length 550.2
  Top Layer w4: U1.Y13@3505.22,3408.04 3523.32,3408.04 3540.54,3425.26 3540.54,3460.26 3600.54,3520.26 v1(3600.54,3571.26) ; v1(3696.54,3586.26) 3696.54,3601.26 3723.54,3628.26 3803.54,3628.26 3843.29,3588.51 3843.29,3565.46 U2.R7@3827.54,3549.72
  Bottom Layer w4: v1(3600.54,3571.26) 3615.54,3586.26 v1(3696.54,3586.26)
SA12: U1.W12 U2.N7 | length 815.9
  Top Layer w4: U1.W12@3479.63,3382.45 3545.73,3382.45 3564.54,3401.26 3564.54,3454.26 3631.54,3521.26 3631.54,3612.26 3696.54,3677.26 3830.54,3677.26 v1(3894.54,3613.26) ; U2.N7@3827.54,3486.73 3851.01,3486.73 3868.54,3504.26 v1(3868.54,3550.26)
  Bottom Layer w4: v1(3868.54,3550.26) 3894.54,3576.26 v1(3894.54,3613.26)
SA13: U1.Y15 U2.T3 | length 675.5
  Top Layer w4: U1.Y15@3505.22,3459.22 3505.22,3471.94 3556.54,3523.26 3556.54,3593.26 3676.54,3713.26 3853.54,3713.26 3953.52,3613.28 U2.T3@3953.52,3581.22
SA14: U1.W16 U2.T7 | length 585.9
  Top Layer w4: U1.W16@3479.63,3484.81 v1(3492.43,3497.6) ; v1(3811.79,3596.96) U2.T7@3827.54,3581.22
  Bottom Layer w4: v1(3492.43,3497.6) 3550.54,3555.72 3550.54,3590.26 3591.54,3631.26 3840.54,3631.26 3864.54,3607.26 3864.54,3585.26 3854.54,3575.26 3833.5,3575.26 v1(3811.79,3596.96)